# Altium PCB led_touch_sensor_pcb.PcbDoc
Units mm, origin at the board's own origin, x right, y up, seen from the top; angles counter-clockwise.
Board outline 23 x 9 mm, 2 copper layers (Top Layer, Bottom Layer); 13 components, 11 nets, 38 pads, 6 vias.
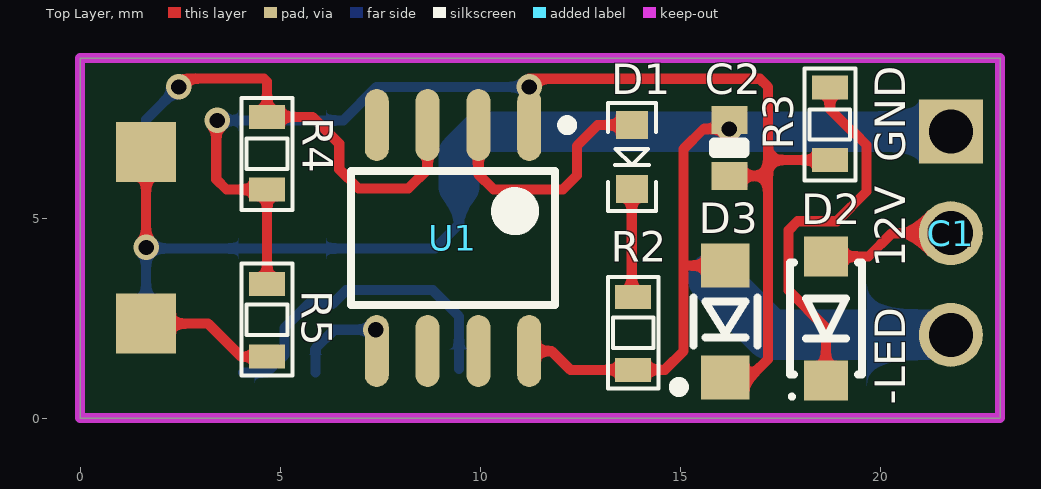
[diagram p0: Top Layer view]
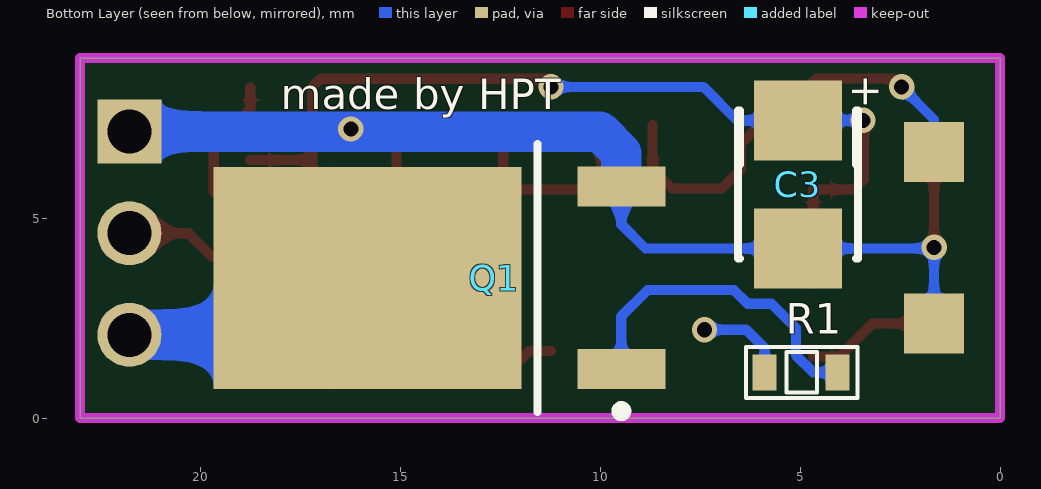
[diagram p1: Bottom Layer view, seen from below]
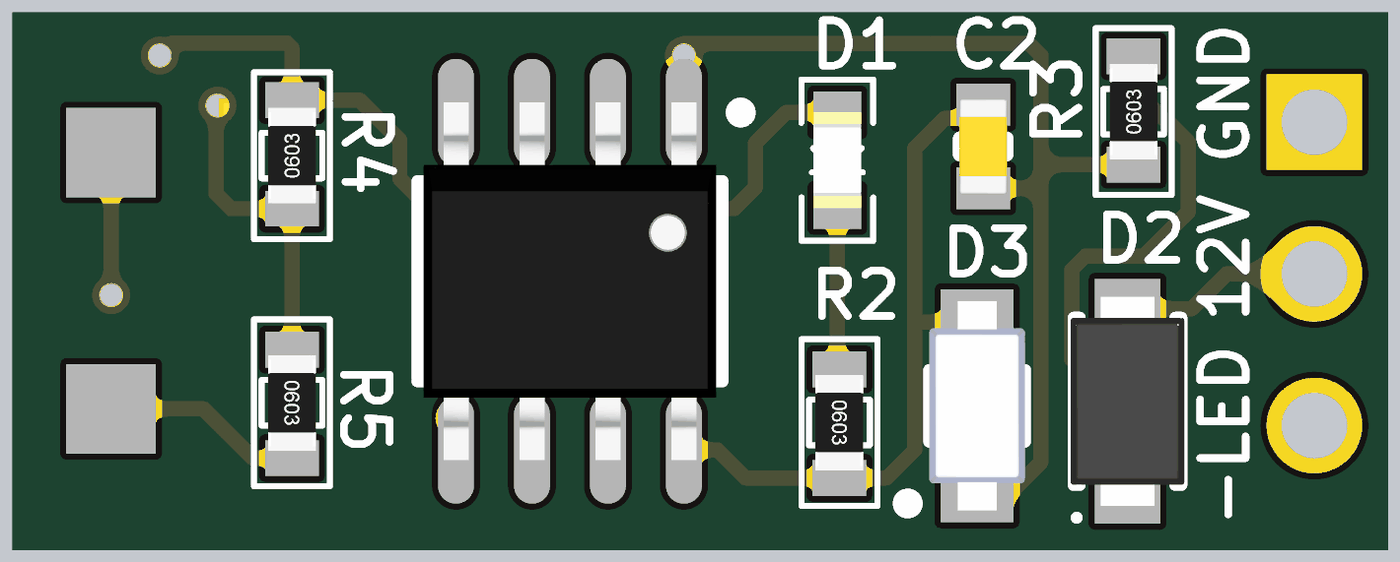
[diagram p2: 3D render of the assembled board from above, using the file's embedded part models]

## Layer stack, top to bottom
Top Solder: solder mask 0.0102, Solder Resist, Dk 3.5
Top Layer: signal copper 0.0356
Dielectric 1: dielectric 0.32, FR-4, Dk 4.8
Bottom Layer: signal copper 0.0356
Bottom Solder: solder mask 0.0102, Solder Resist, Dk 3.5

## Board outline
0,0 23,0 23,9 0,9

## Design rules (kind name [scope] priority, off if disabled: settings)
Clearance [All] p1: gap=0.254
PolygonConnect [All] p1: connectstyle=Relief reliefconductorwidth=0.254 reliefentries=4 polygonreliefangle="90 Angle" airgapwidth=0.254
RoomDefinition led_touch_sensor_schematic [InComponentClass('led_touch_sensor_schematic')] p1: confinementstyle=ConfineIn formatcopy=TRUE lockcomponents=FALSE outline 30.404,-2.667 81.204,-2.667 81.204,22.733 30.404,22.733
RoutingVias [All] p1: holewidth=0.381 width=0.635 viastyle="Through Hole" minholewidth=0.381 minwidth=0.635 maxholewidth=0.711 maxwidth=1.27
SolderMaskExpansion [All] p1: expansion=0.102
Width [All] p1: maxlimit=1.27 minlimit=0.254 preferedwidth=0.254
30 further rules are at their usual default settings.

## Components (designator, comment, footprint, x,y, rotation, side; value= is the part's Value field where it differs from the comment)
C1 "JP3" JP3-D1T 21.768,7.163 r270 top
C2 "0.33uF 25V 0603" C0603[1608X92] 16.231,6.756 r270 top
C3 "CAPACITOR TANTALO" "CASE B" 5.055,5.842 r270 bottom
D1 "LED_0603_ORANGE_5mA" LED0603 13.792,6.528 r270 top
D2 "PTVS51VS1UTR" SOD-123W 18.644,2.489 r90 top
D3 "PMEG6020ER" SOD-123 16.129,2.413 r90 top
Q1 "IRF3708" TO-252AA_M 14.021,3.505 r0 bottom
R1 "1K" RES-SMD-0603 4.958,1.143 r0 bottom
R2 "1K" RES-SMD-0603 13.827,2.134 r270 top
R3 "33" RES-SMD-0603 18.745,7.341 r90 top
R4 "10K" RES-SMD-0603 4.674,6.604 r90 top
R5 "10K" RES-SMD-0603 4.674,2.464 r270 top
U1 "PIC12F508" SO8 9.322,4.5 r270 top

## Footprints (in the part's own frame and the unit in brackets; to place one, negate y for a bottom-side part, rotate by r counter-clockwise, add the part's x,y. Pads: shape width x height; smd on the part's side, far side on the other; paste and mask are expansions set on the pad)
C0603[1608X92] [mm] "Chip Capacitor, Body 1.6x0.8mm"
  rect 0.7x0.9 smd: 1(-0.7,0) 2(0.7,0)
  silkscreen extent -0.13,-0.38 0.13,0.38, body extent -0.8,-0.4 0.8,0.4, height 0.93
"CASE B" [mm] "Capacitor Tantalum; Body 3.5 x 2.8 mm"
  rect 2x2.2 smd: 1(-1.6,0) 2(1.6,0)
  silkscreen extent -1.85,-1.5 1.85,1.5, body extent -1.85,-1.4 1.85,1.6, height 2.06
JP3-D1T [mm] "3 pins, 1 row, straight, gold plating"
  rect 1.6x1.6 hole 1.1: 1(0,0)
  round 1.6 hole 1.1: 2(2.54,0) 3(5.08,0)
LED0603 [mm]
  rect 0.7x0.8 smd: A(-0.8,0) C(0.8,0)
  silkscreen extent -1.35,-0.6 1.35,0.6, body extent -0.8,-0.4 0.8,0.4, height 0.75
RES-SMD-0603 [mm]
  rect 0.6x0.9 smd: 1(-0.889,0) 2(0.927,0)
  silkscreen extent -1.4,-0.64 1.4,0.64, body extent -0.8,-0.4 0.8,0.4, height 0.43
SO8 [mm] "SOIC, 8-Leads, Body 4.9x3.9mm, Pitch 1.27mm, IPC High Density"
  oval 1.8x0.6 smd: 1(-2.825,1.905) 2(-2.825,0.635) 3(-2.825,-0.635) 4(-2.825,-1.905) 5(2.825,-1.905) 6(2.825,-0.635) 7(2.825,0.635) 8(2.825,1.905)
  silkscreen extent -2.95,-2.55 1.68,2.98, body extent -2.99,-2.45 3,2.45, height 1.6
SOD-123 [mm] "SOD, 2-Leads, Body 2.69x1.6mm"
  rect 1.1x1.22 smd: 1(-1.4,0) 2(1.4,0)
  silkscreen extent -1.76,-0.8 0.6,1.28, body extent -1.75,-0.8 1.75,0.8, height 1.1
SOD-123W [mm] "SODFL, 2-Leads, Body 1.70x3.50mm, IPC Medium Density"
  rect 1x1.1 smd: 1(-1.55,0) 2(1.55,0)
  silkscreen extent -2,-0.9 1.4,0.9, body extent -1.75,-0.95 1.75,0.95, height 1.1
TO-252AA_M [mm] "D-PAK, 4-Leads, Body 6.1x6.5mm, Pitch 2.28mm, Lead Span 9.9mm, IPC Low Density"
  rect 2.2x1 smd: 1(-4.55,2.28) 3(-4.55,-2.28)
  rect 7.7x5.55 smd: 4(1.8,0)
  silkscreen extent -4.67,-3.35 -2.45,3.45, body extent -2.2,-3.37 4.15,3.37, height 2.38

## Part data
C1: "WR-PHD 2.54 mm Angled Socket Header"
C2: library part CAP_0.33uF_25V_0603_10%, "0.33uF 25V 10% 0603 (1608 Metric)"
C3: "CAPACITOR TANTALO Case B"
D2: library part PTVS51VS1UTR,115
Q1: library part IRFR18N15D, "HEXFET Power MOSFET"
R1 R2 R3 R4 R5: library part Res-SMD, "Resistor"
U1: "8-bit Flash Microcontroller, 512 (x12-Bit words) Program Memory, 25 Bytes Data Memory, 8-Pin PDIP, Extended Temperature"

## Free pads (board coordinates)
  rect 1.5x1.5 smd: 4(1.651,2.362) 4(1.651,6.655)
  rect 1.5x1.5 smd far side: 4(1.651,2.362) 4(1.651,6.655)

## Via types
v1: diameter 0.635, hole 0.381, Top Layer to Bottom Layer, tented both sides, 6 vias

## Nets (pads, with @x,y where several pads share a name; then routed paths per layer and width w, separated by ;. In a path a pad name is that pad's centre, name@x,y a point inside that pad or via, vN(x,y) a via of type N, cw(c..) or ccw(c..) an arc to the next point about the centre after c; other vN are vias at no path point)
5V: C2.2 C3.1 D3.1 R3.1 R4.1 R5.1 U1.1 | length 30.2
  Top Layer w0.254: v1(3.429,7.442) 3.404,7.417 3.404,5.969 3.658,5.715 R4.1 R5.1 ; v1(11.227,8.28) 11.227,8.484 16.993,8.484 17.196,8.28 17.196,6.056 ; D3.1 16.736,1.013 17.196,1.473 17.196,6.056 ; C2.2 17.196,6.056 ; 17.196,6.452 R3.1
  Bottom Layer w0.254: v1(3.429,7.442) C3.1 6.578,7.442 7.417,8.28 v1(11.227,8.28)
ANODE: pad.4@1.651,2.362 R5.2 | length 3.4
  Top Layer w0.254: pad.4@1.651,2.362 3.2,2.362 4.026,1.537 R5.2
COLLECTOR: pad.4@1.651,6.655 R4.2 U1.3 | length 11.6
  Top Layer w0.254: v1(2.464,8.28) 2.675,8.492 4.589,8.492 4.673,8.407 R4.2 5.804,7.531 6.477,6.858 6.477,6.223 6.96,5.74 8.204,5.74 8.687,6.223 U1.3
  Bottom Layer w0.254: pad.4@1.651,6.655 1.651,7.468 v1(2.464,8.28)
GND: C1.1 C2.1 C3.2 D3.2 pad.4@1.651,2.362 pad.4@1.651,6.655 Q1.3 R2.2 U1.8 | length 38.3
  Top Layer w0.254: v1(1.651,4.267) pad.4@1.651,6.655 ; U1.8 11.787,1.675 12.255,1.207 R2.2 14.618,1.207 15.088,1.676 15.088,6.731 15.584,7.228 v1(16.231,7.228) ; 15.091,3.813 D3.2
  Bottom Layer w0.254: pad.4@1.651,2.362 v1(1.651,4.267) ; v1@1.676,4.242 C3.2 8.865,4.242 9.471,4.848 Q1.3
  Bottom Layer w1.016: Q1.3 9.471,6.626 10.008,7.163 C1.1
LED: C1.3 Q1.4 | length 6.5
  Bottom Layer w1.27: Q1.4 17.243,2.083 C1.3
NetC1_2: C1.2 D2.2 | length 3.4
  Top Layer w0.254: D2.2 19.711,4.039 20.295,4.623 C1.2
NetD1_A: D1.A U1.2 | length 6.3
  Top Layer w0.254: U1.2 9.957,6.096 10.338,5.715 12.065,5.715 12.421,6.071 12.421,6.807 12.941,7.328 D1.A
NetD1_C: D1.C R2.1 | length 2.7
  Top Layer w0.254: D1.C 13.792,3.058 R2.1
NetD2_1: D2.1 R3.2 | length 9.5
  Top Layer w0.254: D2.1 18.644,2.261 17.713,3.192 17.713,4.697 17.936,4.92 18.916,4.92 19.66,5.664 19.66,6.826 19.353,7.133 19.334,7.133 18.745,7.722 R3.2
NetQ1_1: Q1.1 R1.1 | length 8.2
  Bottom Layer w0.254: R1.1 4.674,1.143 5.105,1.575 5.105,2.251 5.715,2.861 6.312,2.861 6.652,3.2 8.814,3.2 9.471,2.543 Q1.1
NetR1_2: R1.2 U1.5 | length 2.3
  Bottom Layer w0.254: R1.2 5.885,1.744 6.35,2.21 v1(7.391,2.21)
pads on no net: U1.4 U1.6 U1.7

## Keep-outs
Keep-Out Layer:
  the board outline again, w0.254

## Silkscreen, mask and mechanical layers (free items; w line width, h text height)
Top Overlay:
  text "GND" at 20.625,6.401 h0.76 r90
  text "12V" at 20.625,3.759 h0.76 r90
  text "-LED" at 20.625,0.33 h0.76 r90
Bottom Overlay:
  text "made by HPT" at 17.983,7.722 h0.76

## Text inside footprints (layer, text, board x,y; h text height)
C3: Bottom Overlay "+" at 3.945,8.592 h1.3 r90